# EAGLE board CT_schematic (EAGLE 7.6.0)

Size 100 x 80 mm. Coordinates in mm from the lower left corner, seen from the top.
Outline: 0,0 100,0 100,80 0,80 0,0
Copper layers (1*16): Top 0.035mm / dielectric 1.5mm / Bottom 0.035mm
Design rules "default": minimum track width 10mil, minimum drill 24mil, track to track 8mil, track to pad 8mil, pad to pad 8mil, via to via 8mil, smd to smd 8mil, copper to edge 40mil, drill to drill 8mil, minimum pad ring 10mil, minimum via ring 8mil, stop-mask expansion 4mil, vias tented up to drill 0mil, thermal gap 10mil

## Footprints (pad centres in the part's own frame; a part is rotated, then mirrored left to right if it is on the bottom)
C0603 = smd 0.8 x 0.8: 1 -0.762,0; 2 0.762,0
C0402 = smd 0.5 x 0.5: 1 -0.508,0; 2 0.508,0
C0805 = smd 1.2 x 1.3: 1 -1.016,0; 2 1.016,0
C1206 = smd 1.3 x 1.6: 1 -1.524,0; 2 1.524,0
L0603 = smd 0.8 x 0.8: 1 -0.762,0; 2 0.762,0
L1210 = smd 1.2 x 2.5: 1 -1.524,0; 2 1.524,0
DR1040 = smd 1.6 x 3.2: 1 -4.458,0; 2 4.458,0
R0603 = smd 0.8 x 0.8: 1 -0.762,0; 2 0.762,0
LQFP64 = smd 0.3 x 1.2: 1 -3.75,-5.75; 2 -3.25,-5.75; 3 -2.75,-5.75; 4 -2.25,-5.75; 5 -1.75,-5.75; 6 -1.25,-5.75; 7 -0.75,-5.75; 8 -0.25,-5.75; 9 0.25,-5.75; 10 0.75,-5.75; 11 1.25,-5.75; 12 1.75,-5.75; 13 2.25,-5.75; 14 2.75,-5.75; 15 3.25,-5.75; 16 3.75,-5.75; 33 3.75,5.75; 34 3.25,5.75; 35 2.75,5.75; 36 2.25,5.75; 37 1.75,5.75; 38 1.25,5.75; 39 0.75,5.75; 40 0.25,5.75; 41 -0.25,5.75; 42 -0.75,5.75; 43 -1.25,5.75; 44 -1.75,5.75; 45 -2.25,5.75; 46 -2.75,5.75; 47 -3.25,5.75; 48 -3.75,5.75 | smd 1.2 x 0.3: 17 5.75,-3.75; 18 5.75,-3.25; 19 5.75,-2.75; 20 5.75,-2.25; 21 5.75,-1.75; 22 5.75,-1.25; 23 5.75,-0.75; 24 5.75,-0.25; 25 5.75,0.25; 26 5.75,0.75; 27 5.75,1.25; 28 5.75,1.75; 29 5.75,2.25; 30 5.75,2.75; 31 5.75,3.25; 32 5.75,3.75; 49 -5.75,3.75; 50 -5.75,3.25; 51 -5.75,2.75; 52 -5.75,2.25; 53 -5.75,1.75; 54 -5.75,1.25; 55 -5.75,0.75; 56 -5.75,0.25; 57 -5.75,-0.25; 58 -5.75,-0.75; 59 -5.75,-1.25; 60 -5.75,-1.75; 61 -5.75,-2.25; 62 -5.75,-2.75; 63 -5.75,-3.25; 64 -5.75,-3.75
SSOP-16 = smd 1.981 x 0.356: 1 -2.464,2.223; 2 -2.464,1.587; 3 -2.464,0.953; 4 -2.464,0.318; 5 -2.464,-0.318; 6 -2.464,-0.953; 7 -2.464,-1.587; 8 -2.464,-2.223; 9 2.464,-2.223; 10 2.464,-1.587; 11 2.464,-0.953; 12 2.464,-0.318; 13 2.464,0.318; 14 2.464,0.953; 15 2.464,1.587; 16 2.464,2.223
HTSS-105-01-G-D = drill 1 pad 1.8 square: 1 0,0 | drill 1 pad 1.8: 2 0,2.54; 3 2.54,0; 4 2.54,2.54; 5 5.08,0; 6 5.08,2.54; 7 7.62,0; 8 7.62,2.54; 9 10.16,0; 10 10.16,2.54
SSOP-20 = smd 1.651 x 0.432: 1 -3.48,2.925; 2 -3.48,2.275; 3 -3.48,1.625; 4 -3.48,0.975; 5 -3.48,0.325; 6 -3.48,-0.325; 7 -3.48,-0.975; 8 -3.48,-1.625; 9 -3.48,-2.275; 10 -3.48,-2.925; 11 3.48,-2.925; 12 3.48,-2.275; 13 3.48,-1.625; 14 3.48,-0.975; 15 3.48,-0.325; 16 3.48,0.325; 17 3.48,0.975; 18 3.48,1.625; 19 3.48,2.275; 20 3.48,2.925
DFN8-S = smd 0.6 x 0.4: 1 -2.69,1.905; 2 -2.69,0.635; 3 -2.69,-0.635; 4 -2.69,-1.905; 5 2.69,-1.905; 6 2.69,-0.635; 7 2.69,0.635; 8 2.69,1.905
ABS07-32.768KHZ-7-T = smd 1.1 x 2.4: 1 -2.5,0; 2 0,0
ASDMB-XX.XXXXMHZ-XX-XX-XXX = smd 0.65 x 0.85: 1 0.45,0.2; 2 2.05,0.2; 3 2.05,1.8; 4 0.45,1.8
TSOT-23-5 = smd 1.3 x 0.62: 1 -1.31,0.95; 2 -1.31,0; 3 -1.31,-0.95; 4 1.31,-0.95; 5 1.31,0.95
DFN8_2X3MC = smd 0.813 x 0.305: 1 -1.398,0.75; 2 -1.398,0.25; 3 -1.398,-0.25; 4 -1.398,-0.75; 5 1.398,-0.75; 6 1.398,-0.25; 7 1.398,0.25; 8 1.398,0.75 | smd 1.753 x 1.549: 9 0,0
JST-2-SMD = smd 1 x 4.6: 1 -1,-3.7; 2 1,-3.7 | smd 1.6 x 3.4: NC1 -3.4,1.5; NC2 3.4,1.5
FCI_10118193-0001LF = smd 0.4 x 1.35: 1 -1.3,2.675; 2 -0.65,2.675; 3 0,2.675; 4 0.65,2.675; 5 1.3,2.675 | smd 1.6 x 1.4: 6 -3.2,2.45; 7 3.2,2.45 | smd 1.9 x 1.9: 8 -1.2,0; 9 1.2,0 | hole 0.5: -3.3,0; 3.3,0
SON-6 = smd 0.55 x 0.3: 1 -0.355,0.5 | smd 0.52 x 0.3: 2 -0.37,0; 3 -0.37,-0.5; 4 0.37,-0.5; 5 0.37,0; 6 0.37,0.5
SW_4-1437565-2 = smd 1.4 x 2.1: 1 -2.23,4.55; 2 -2.23,-4.55; 3 2.23,4.55; 4 2.23,-4.55
LGM67K-G1J2-24-Z = smd 0.8 x 1.4: A -2,0; C 0,0
NC7SZ125M5X = smd 1.3 x 0.7: 1 -1.3,0.95; 2 -1.3,0; 3 -1.3,-0.95; 4 1.3,-0.95; 5 1.3,0.95

## Placement (x,y rotation side)
C1  1e-06  [C0603]  -36.83,66.04 0 top  (outside the outline)
C2  1e-07  [C0603]  -40.64,66.04 0 top  (outside the outline)
C3  1e-07  [C0603]  -44.45,66.04 0 top  (outside the outline)
C4  1e-07  [C0603]  -48.26,66.04 0 top  (outside the outline)
C5  1e-07  [C0603]  -52.07,66.04 0 top  (outside the outline)
C6  1e-07  [C0603]  -55.88,66.04 0 top  (outside the outline)
C7  4.7e-06  [C0603]  -29.21,66.04 0 top  (outside the outline)
C8  1e-08  [C0603]  -59.69,66.04 0 top  (outside the outline)
C9  1e-06  [C0603]  -63.5,66.04 0 top  (outside the outline)
C10  1e-11  [C0402]  -60.96,71.12 0 top  (outside the outline)
C11  1e-11  [C0402]  -64.77,71.12 0 top  (outside the outline)
C12  1e-06  [C0603]  -67.31,66.04 0 top  (outside the outline)
C13  1e-06  [C0603]  -15.24,71.12 0 top  (outside the outline)
C14  2.2e-07  [C0603]  -33.02,66.04 0 top  (outside the outline)
C15  1e-06  [C0603]  -19.05,71.12 0 top  (outside the outline)
C16  1e-06  [C0603]  -22.86,71.12 0 top  (outside the outline)
C17  1e-06  [C0603]  -26.67,71.12 0 top  (outside the outline)
C18  1e-06  [C0603]  -30.48,71.12 0 top  (outside the outline)
C19  1e-06  [C0603]  -34.29,71.12 0 top  (outside the outline)
C20  4.7e-06  [C0805]  -34.29,54.61 0 top  (outside the outline)
C21  1e-08  [C0402]  -68.58,71.12 0 top  (outside the outline)
C22  1e-08  [C0402]  -15.24,76.2 0 top  (outside the outline)
C23  1e-05  [C0805]  -39.37,54.61 0 top  (outside the outline)
C24  1e-05  [C0805]  -44.45,54.61 0 top  (outside the outline)
C25  1e-07  [C0402]  -19.05,76.2 0 top  (outside the outline)
C26  1e-05  [C1206]  -16.51,55.88 0 top  (outside the outline)
C27  1e-05  [C1206]  -22.86,55.88 0 top  (outside the outline)
C28  1e-08  [C0402]  -22.86,76.2 0 top  (outside the outline)
F1  240.0  [L0603]  -38.1,71.12 0 top  (outside the outline)
I1  1e-05  [L1210]  -59.69,45.72 0 top  (outside the outline)
I2  1.5e-05  [L1210]  -66.04,45.72 0 top  (outside the outline)
I3  5.2e-06  [DR1040]  -62.23,6.35 0 top  (outside the outline)
R2  1000.0  [R0603]  -41.91,71.12 0 top  (outside the outline)
R4  4700.0  [R0603]  -45.72,71.12 0 top  (outside the outline)
R5  2200.0  [R0603]  -49.53,71.12 0 top  (outside the outline)
R6  2200.0  [R0603]  -53.34,71.12 0 top  (outside the outline)
R7  10000.0  [R0603]  -40.64,60.96 0 top  (outside the outline)
R8  10000.0  [R0603]  -45.72,60.96 0 top  (outside the outline)
R9  100000.0  [R0603]  -62.23,54.61 0 top  (outside the outline)
R10  100000.0  [R0603]  -67.31,54.61 0 top  (outside the outline)
R11  100000.0  [R0603]  -15.24,60.96 0 top  (outside the outline)
R12  100000.0  [R0603]  -20.32,60.96 0 top  (outside the outline)
R13  10000.0  [R0603]  -50.8,60.96 0 top  (outside the outline)
R14  10000.0  [R0603]  -55.88,60.96 0 top  (outside the outline)
R15  10000.0  [R0603]  -60.96,60.96 0 top  (outside the outline)
R16  490000.0  [R0603]  -25.4,60.96 0 top  (outside the outline)
R17  1000000.0  [R0603]  -57.15,54.61 0 top  (outside the outline)
R18  10000.0  [R0603]  -66.04,60.96 0 top  (outside the outline)
R19  10000.0  [R0603]  -15.24,66.04 0 top  (outside the outline)
R20  82000.0  [R0603]  -20.32,66.04 0 top  (outside the outline)
R21  300000.0  [R0603]  -30.48,60.96 0 top  (outside the outline)
R22  120000.0  [R0603]  -35.56,60.96 0 top  (outside the outline)
R23  2000.0  [R0603]  -57.15,71.12 0 top  (outside the outline)
R24  10000.0  [R0603]  -25.4,66.04 0 top  (outside the outline)
U1  STM32F358RCT6  [LQFP64]  -30.48,7.62 0 top  (outside the outline)
U2  LTC2804CGN-1#PBF  [SSOP-16]  -44.45,26.67 0 top  (outside the outline)
U3  HTSS-105-01-G-D  [HTSS-105-01-G-D]  -27.94,36.83 0 top  (outside the outline)
U4  MAX3218EAP+T  [SSOP-20]  -55.88,36.83 0 top  (outside the outline)
U5  HTSS-105-01-G-D  [HTSS-105-01-G-D]  -46.99,36.83 0 top  (outside the outline)
U6  24AA512-I/MF  [DFN8-S]  -58.42,27.94 0 top  (outside the outline)
U7  ABS07-32.768KHZ-7-T  [ABS07-32.768KHZ-7-T]  -39.37,46.99 0 top  (outside the outline)
U8  ASDMB-25.000MHZ-EC-T  [ASDMB-XX.XXXXMHZ-XX-XX-XXX]  -16.51,1.27 0 top  (outside the outline)
U9  ltc3406es5  [TSOT-23-5]  -49.53,54.61 0 top  (outside the outline)
U10  MCP73831T-2ACI/MC  [DFN8_2X3MC]  -31.75,74.93 0 top  (outside the outline)
U11  S2B-PH-SM4-TB(LF)(SN)  [JST-2-SMD]  -22.86,27.94 0 top  (outside the outline)
U12  10118193-0001LF  [FCI_10118193-0001LF]  -19.05,46.99 0 top  (outside the outline)
U13  TPS3895ADRYR  [SON-6]  -25.4,74.93 0 top  (outside the outline)
U14  4-1437565-2  [SW_4-1437565-2]  -52.07,6.35 0 top  (outside the outline)
U15  Q65110A2395  [LGM67K-G1J2-24-Z]  -48.26,46.99 0 top  (outside the outline)
U16  nc7sz125m5x  [NC7SZ125M5X]  -27.94,54.61 0 top  (outside the outline)

## Library data of the parts
C1-C28 F1 I1-I3 R2 R4-R24 U1-U16 = circuit_tree

## Nets
CLK_CRYSTAL_U1_3: C10.1 U1.3 U7.1
CLK_CRYSTAL_U1_4: C11.1 U1.4 U7.2
CLK_U1_5: U1.5 U8.3
GND: C1.2 C2.2 C3.2 C4.2 C5.2 C6.2 C7.2 C8.2 C9.2 C10.2 C11.2 C12.2 C13.2 C15.2 C16.2 C17.2 C18.2 C19.2 C21.2 C22.2 C23.2 C24.1 C24.2 C25.2 C26.2 C27.2 C28.2 R2.2 R7.2 R8.2 R15.2 R16.2 R20.2 R22.2 R23.2 U1.12 U1.31 U1.47 U1.63 U2.8 U3.9 U4.5 U4.17 U4.20 U5.9 U6.4 U8.2 U9.2 U10.6 U10.9 U11.2 U12.5 U12.6 U12.7 U12.8 U12.9 U13.2 U15.C U16.1 U16.3
INPUT_USBPOWER_5V: C26.1 R24.2 U10.1 U10.2 U12.1
NET_U1_7: R4.1 U1.7 U16.4
NET_U1_13: C8.1 C9.1 F1.1 U1.13
NET_U1_28: R8.1 U1.28
NET_U1_49: R6.1 U1.49 U6.5
NET_U1_50: R5.1 U1.50 U6.6
NET_U1_60: R7.1 U1.60
NET_U1_61: U15.A
NET_U1_62: U14.3 U14.4
NET_U2_6: C12.1 U2.6
NET_U2_7: C14.1 I1.2 U2.7
NET_U2_9: C13.1 U2.9
NET_U2_10: C14.2 U2.10
NET_U2_11: R9.1 U2.11
NET_U3_3: U2.1 U3.3
NET_U3_4: U2.2 U3.4
NET_U3_5: U2.3 U3.5
NET_U3_6: U2.4 U3.6
NET_U4_1: I2.1 U4.1
NET_U4_2: R10.1 U4.2
NET_U4_3: R11.1 U4.3
NET_U4_4: R12.1 U4.4
NET_U4_15: C19.1 U4.15
NET_U4_16: C20.2 U4.16
NET_U4_18: C20.1 U4.18
NET_U4_19: C18.1 U4.19
NET_U5_3: U4.12 U5.3
NET_U5_4: U4.11 U5.4
NET_U5_5: U4.14 U5.5
NET_U5_6: U4.13 U5.6
NET_U6_1: R13.1 U6.1
NET_U6_2: R14.1 U6.2
NET_U6_3: R15.1 U6.3
NET_U9_1: U9.1
NET_U9_3: I3.1 U9.3
NET_U9_5: R16.1 R17.1 U9.5
NET_U9_ATNET_3: I3.2 R17.2
NET_U10_5: R24.1 U10.5
NET_U10_8: R23.1 U10.8
NET_U13_1: R19.1 R20.1 U13.1
NET_U13_3: R21.2 R22.1 U13.3
NET_U13_4: R18.1 U13.4 U16.2
NET_U14_1: R2.1 U14.1 U14.2
PROC_UART4_RX: U1.52 U2.16
PROC_UART4_TX: U1.51 U2.14
PROC_UART5_RX: U1.54 U4.9
PROC_UART5_TX: U1.53 U4.7
VCC_S1_3V7: C23.1 C27.1 U9.4 U10.3 U10.4 U11.1
VCC_TIER1_1V8: C1.1 C2.1 C3.1 C4.1 C5.1 C6.1 C7.1 C15.1 C16.1 C17.1 C21.1 C22.1 C24.2 C25.1 C28.1 F1.2 I1.1 I2.2 I3.2 R4.2 R5.2 R6.2 R9.2 R10.2 R11.2 R12.2 R13.2 R14.2 R17.2 R18.2 R19.2 R21.1 U1.1 U1.19 U1.32 U1.48 U1.64 U2.5 U2.12 U4.6 U6.7 U6.8 U8.4 U13.6 U16.5

## Tracks (layer width: path | path; a pad name or v marks a point on that pad's centre or on a via)
CLK_CRYSTAL_U1_3  (2 unrouted)
CLK_CRYSTAL_U1_4  (2 unrouted)
CLK_U1_5  (1 unrouted)
GND  (59 unrouted)
INPUT_USBPOWER_5V  (4 unrouted)
NET_U1_7  (2 unrouted)
NET_U1_13  (3 unrouted)
NET_U1_28  (1 unrouted)
NET_U1_49  (2 unrouted)
NET_U1_50  (2 unrouted)
NET_U1_60  (1 unrouted)
NET_U1_62  (1 unrouted)
NET_U2_6  (1 unrouted)
NET_U2_7  (2 unrouted)
NET_U2_9  (1 unrouted)
NET_U2_10  (1 unrouted)
NET_U2_11  (1 unrouted)
NET_U3_3  (1 unrouted)
NET_U3_4  (1 unrouted)
NET_U3_5  (1 unrouted)
NET_U3_6  (1 unrouted)
NET_U4_1  (1 unrouted)
NET_U4_2  (1 unrouted)
NET_U4_3  (1 unrouted)
NET_U4_4  (1 unrouted)
NET_U4_15  (1 unrouted)
NET_U4_16  (1 unrouted)
NET_U4_18  (1 unrouted)
NET_U4_19  (1 unrouted)
NET_U5_3  (1 unrouted)
NET_U5_4  (1 unrouted)
NET_U5_5  (1 unrouted)
NET_U5_6  (1 unrouted)
NET_U6_1  (1 unrouted)
NET_U6_2  (1 unrouted)
NET_U6_3  (1 unrouted)
NET_U9_3  (1 unrouted)
NET_U9_5  (2 unrouted)
NET_U9_ATNET_3  (1 unrouted)
NET_U10_5  (1 unrouted)
NET_U10_8  (1 unrouted)
NET_U13_1  (2 unrouted)
NET_U13_3  (2 unrouted)
NET_U13_4  (2 unrouted)
NET_U14_1  (2 unrouted)
PROC_UART4_RX  (1 unrouted)
PROC_UART4_TX  (1 unrouted)
PROC_UART5_RX  (1 unrouted)
PROC_UART5_TX  (1 unrouted)
VCC_S1_3V7  (5 unrouted)
VCC_TIER1_1V8  (44 unrouted)